# Altium PCB smartport_inverter_Panel5X5.PcbDoc
Units mm, origin at the board's own origin, x right, y up, seen from the top; angles counter-clockwise.
Board outline 81.92 x 79.98 mm, 2 copper layers (Top Layer, Bottom Layer), stack 1.57 mm thick; 8 components, 6 nets, 8 pads, 3 vias.
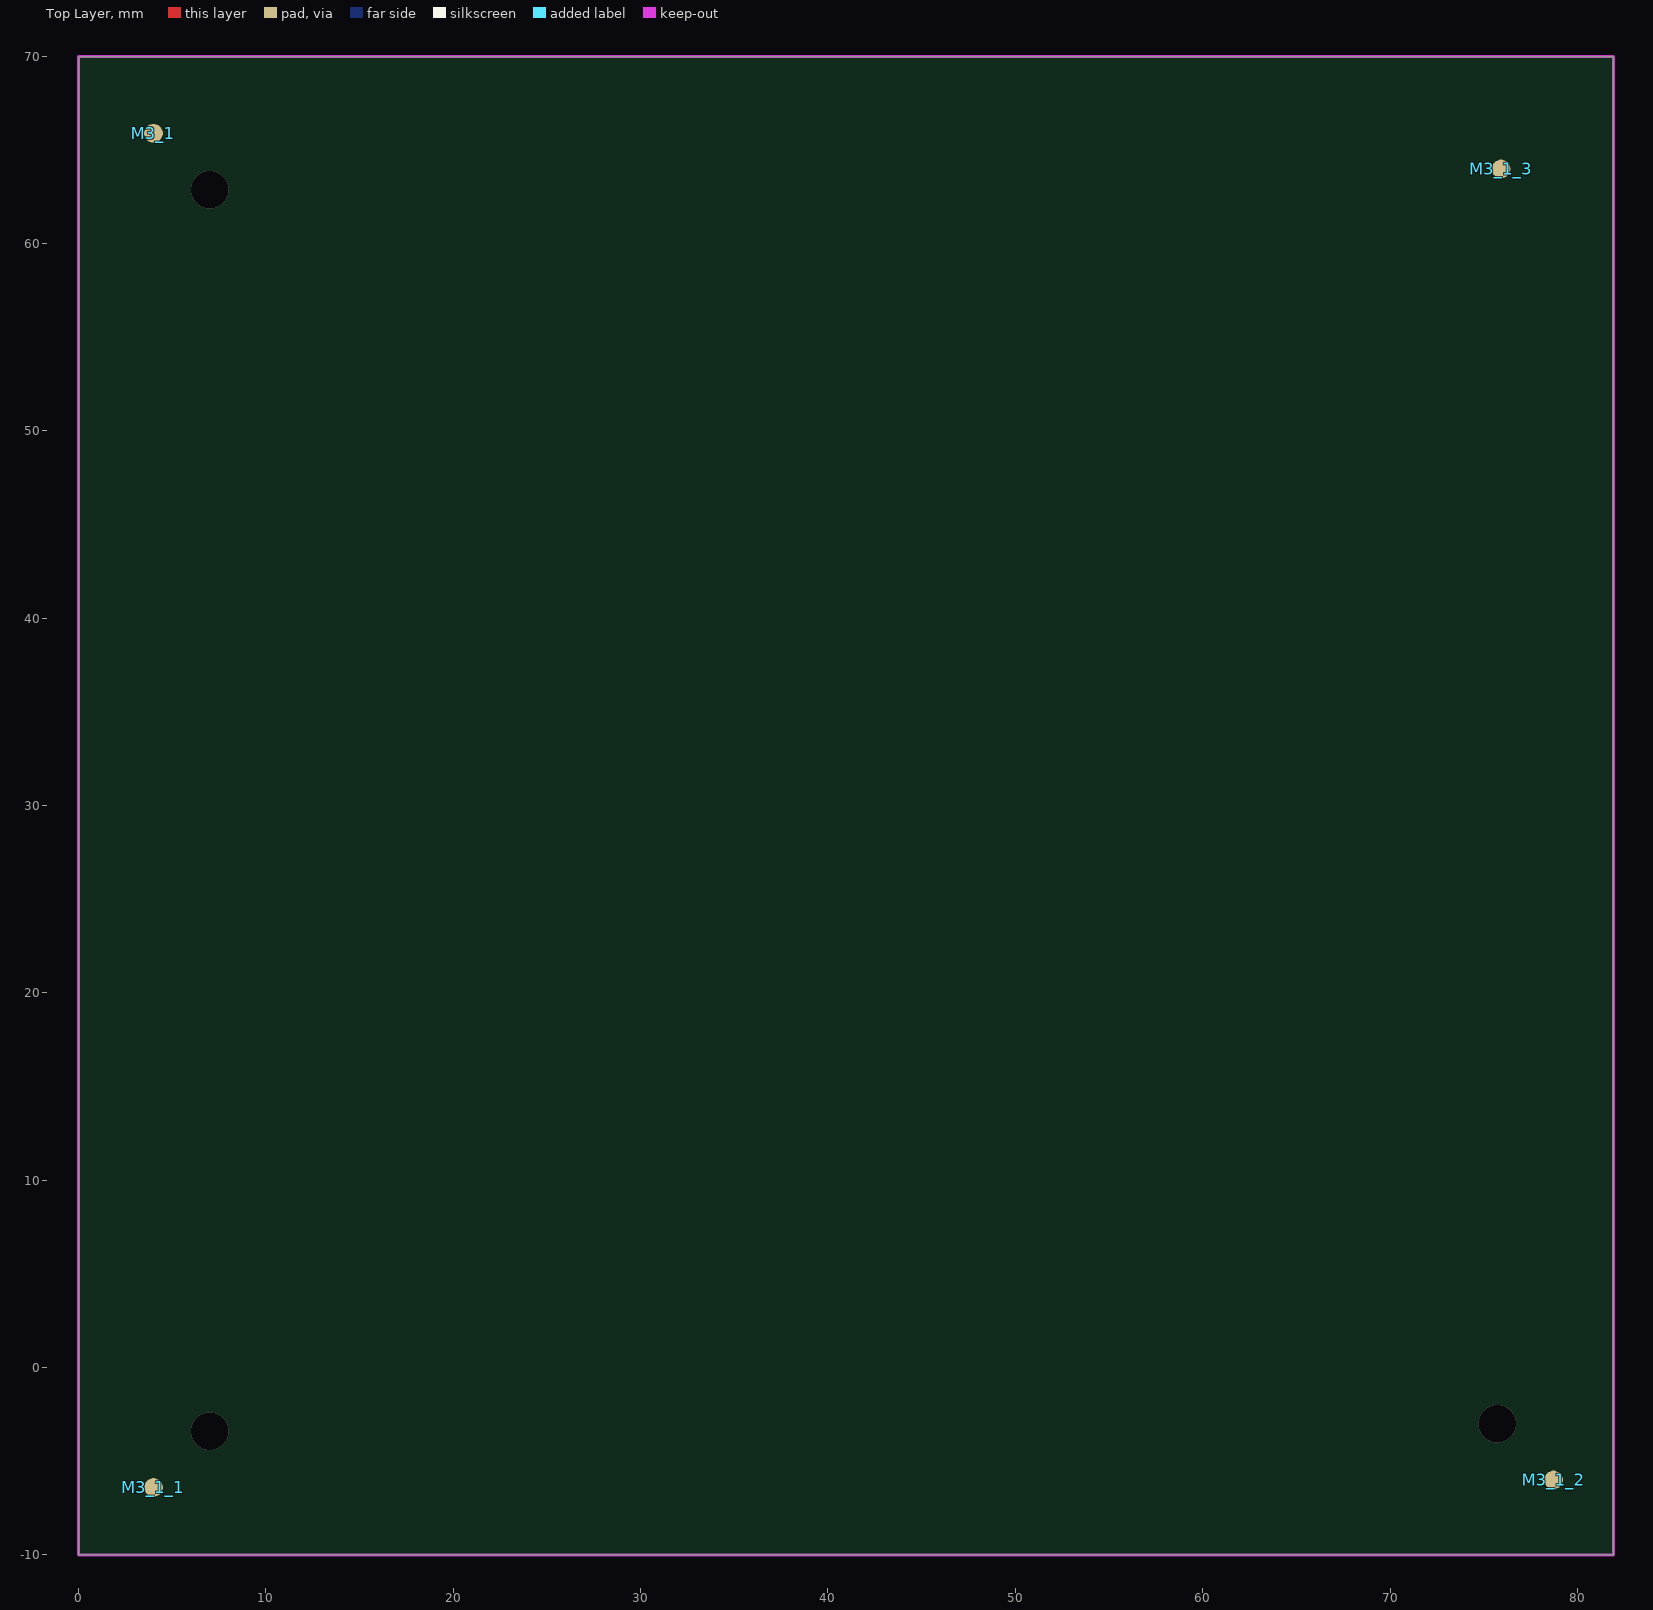
[diagram p0: Top Layer view]
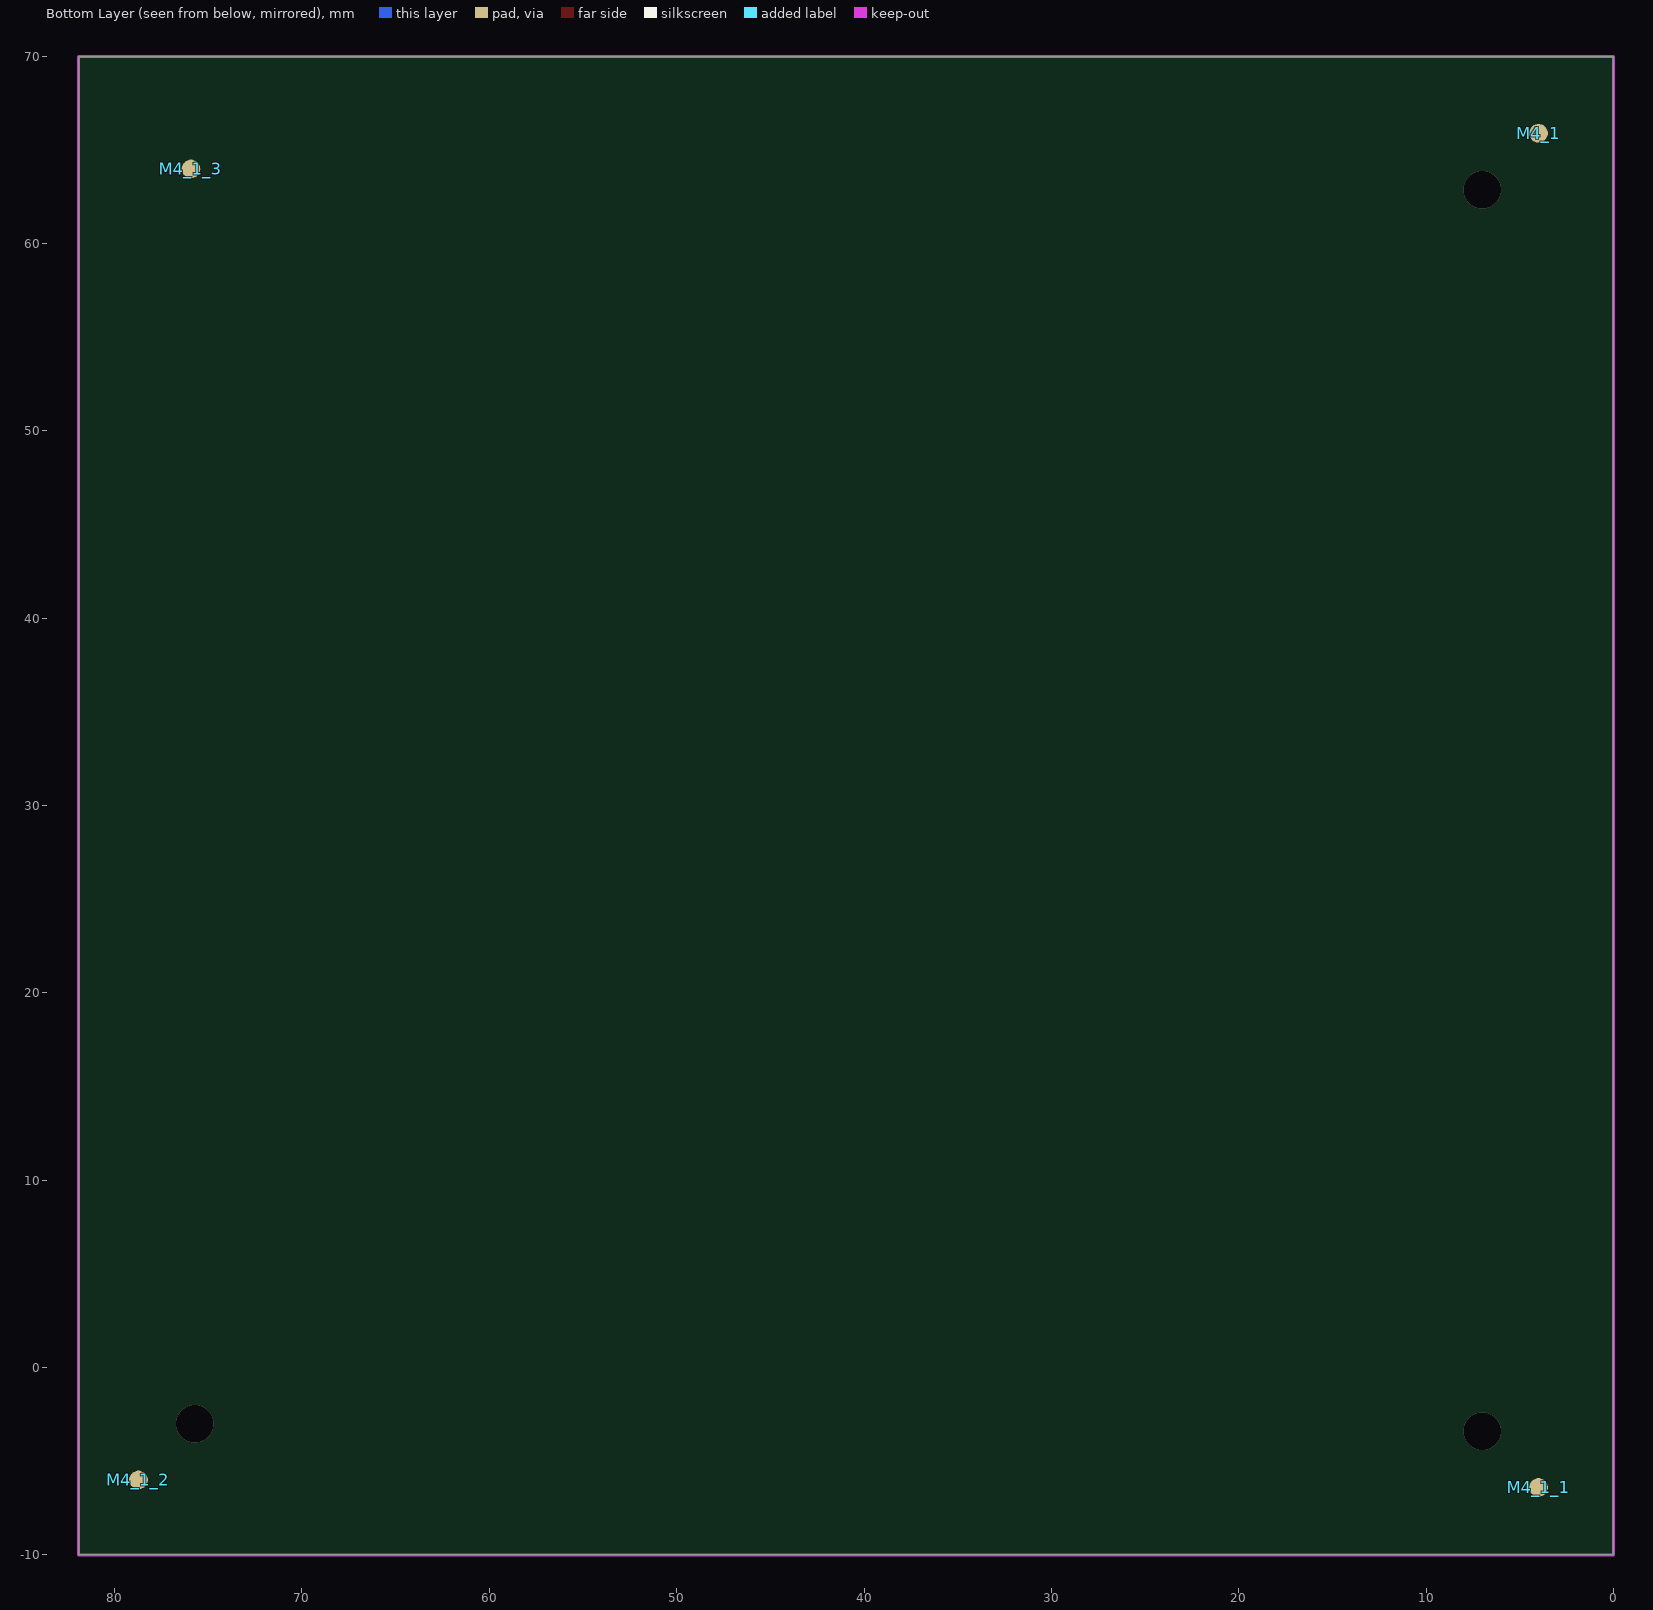
[diagram p1: Bottom Layer view, seen from below]

## Layer stack, top to bottom
Top Solder: solder mask 0.0102, Solder Resist, Dk 3.5
Top Layer: signal copper 0.035
Dielectric: core 1.5, FR-4, Dk 4.8
Bottom Layer: signal copper 0.035
Bottom Solder: solder mask 0.0102, Solder Resist, Dk 3.5

## Board outline
0,-10 81.925,-10 81.925,69.975 0,69.975

## Design rules (kind name [scope] priority, off if disabled: settings)
Clearance [All] p1: gap=0.35 ignorepadtopadclearanceinfootprint=FALSE except(0: Arc-Hole Track-THPad Track-Hole SMDPad-Hole THPad-Hole Via-Hole Fill-Hole Poly-Hole Region-Hole Text-Hole; 0.2: Arc-Arc Arc-Track Arc-SMDPad Arc-THPad Arc-Via Track-Track Track-SMDPad Track-Via SMDPad-SMDPad SMDPad-THPad SMDPad-Via THPad-THPad THPad-Via Via-Via)
ComponentClearance [All] p1: gap=0.25 collisioncheckmode=3 verticalgap=0 showdistances=FALSE
DiffPairsRouting DiffPairsRouting_USB [InDifferentialPair('USB')] p1: maxlimit=10 minlimit=0.1 mostfreqgap=0.1 toplayer_minwidth=0.16 toplayer_maxwidth=0.5 toplayer_prefwidth=0.2 bottomlayer_minwidth=0.16 bottomlayer_maxwidth=0.5 bottomlayer_prefwidth=0.2 maxuncoupledlength=12.7
DiffPairsRouting DiffPairsRouting_USB_D [InDifferentialPair('USB_D')] p2: maxlimit=10 minlimit=0.1 mostfreqgap=0.1 toplayer_minwidth=0.16 toplayer_maxwidth=0.5 toplayer_prefwidth=0.2 bottomlayer_minwidth=0.16 bottomlayer_maxwidth=0.5 bottomlayer_prefwidth=0.2 maxuncoupledlength=12.7
DiffPairsRouting DiffPairsRouting_ETH_RD [InDifferentialPair('ETH_RD')] p3: maxlimit=10 minlimit=0.1 mostfreqgap=0.1 toplayer_minwidth=0.16 toplayer_maxwidth=0.5 toplayer_prefwidth=0.2 bottomlayer_minwidth=0.16 bottomlayer_maxwidth=0.5 bottomlayer_prefwidth=0.2 maxuncoupledlength=12.7
DiffPairsRouting DiffPairsRouting_ETH_TD [InDifferentialPair('ETH_TD')] p4: maxlimit=10 minlimit=0.1 mostfreqgap=0.1 toplayer_minwidth=0.16 toplayer_maxwidth=0.5 toplayer_prefwidth=0.2 bottomlayer_minwidth=0.16 bottomlayer_maxwidth=0.5 bottomlayer_prefwidth=0.2 maxuncoupledlength=12.7
DiffPairsRouting [All] p5: maxlimit=0.16 minlimit=0.1 mostfreqgap=0.1 toplayer_minwidth=0.16 toplayer_maxwidth=0.5 toplayer_prefwidth=0.2 bottomlayer_minwidth=0.16 bottomlayer_maxwidth=0.5 bottomlayer_prefwidth=0.2 maxuncoupledlength=12.7
Height [All] p1: minheight=0 maxheight=20 prefheight=10
HoleSize HoleSize_BGA [isVia And WithinRoom('MCU_IO')] p1: absolutevalues=TRUE maxlimit=2.5 minlimit=0.1 maxpercent=80.000 minpercent=20.000
HoleSize [All] p2: absolutevalues=TRUE maxlimit=15 minlimit=0.2 maxpercent=80.000 minpercent=20.000
HoleToHoleClearance [All] p1: gap=0.4 allowstackedmicrovias=TRUE
MatchedLengths MD_MatchedLengths [InNetClass('MD')] p1: tolerance=2 checknetsindiffpair=FALSE checkdiffpairvsdiffpair=TRUE checkxsignals=TRUE checkothers=TRUE
MatchedLengths SD_MatchedLengths [InNetClass('SD')] p2: tolerance=8 checknetsindiffpair=FALSE checkdiffpairvsdiffpair=TRUE checkxsignals=TRUE checkothers=TRUE
MatchedLengths SSD_MatchedLengths [InNetClass('SSD')] p3: tolerance=10 checknetsindiffpair=FALSE checkdiffpairvsdiffpair=TRUE checkxsignals=TRUE checkothers=TRUE
MatchedLengths XIP_MatchedLengths [InNetClass('XIP')] p4: tolerance=10 checknetsindiffpair=FALSE checkdiffpairvsdiffpair=TRUE checkxsignals=TRUE checkothers=TRUE
MatchedLengths Flash [InNetClass('Flash')] p5: tolerance=1.27 checknetsindiffpair=FALSE checkdiffpairvsdiffpair=TRUE checkxsignals=TRUE checkothers=TRUE
MatchedLengths DiffPair_ETHMatchedLengths [InDifferentialPairClass('DP_ETH')] p6: tolerance=2.3 checknetsindiffpair=TRUE checkdiffpairvsdiffpair=FALSE checkxsignals=FALSE checkothers=FALSE
MatchedLengths RMII_MatchedLengths [InNetClass('RMII')] p7: tolerance=8 checknetsindiffpair=FALSE checkdiffpairvsdiffpair=TRUE checkxsignals=TRUE checkothers=TRUE
MatchedLengths DiffPair_DP_USBMatchedLengths [InDifferentialPair ('USB_D')] p8: tolerance=14.2 checknetsindiffpair=TRUE checkdiffpairvsdiffpair=FALSE checkxsignals=FALSE checkothers=FALSE
MinimumAnnularRing "MinimumAnnularRing Mid-Layer 1" [OnLayer('Mid-Layer 1')] p1: minimumring=0.35
MinimumAnnularRing "MinimumAnnularRing Mid-Layer 2" [OnLayer('Mid-Layer 2')] p2: minimumring=0.35
MinimumAnnularRing [All] p3: minimumring=0.1
MinimumSolderMaskSliver [All] p1: minsoldermaskwidth=0.07
NetAntennae NetAntennae_JTAG [InNetClass('JTAG')] p1: netantennaetolerance=20
NetAntennae [All] p2: netantennaetolerance=0
PlaneClearance [All] p1: clearance=0.5
PlaneConnect [All] p1: planeconnectstyle=Relief reliefexpansion=0.5 reliefentries=4 reliefconductorwidth=0.25 reliefairgap=0.25
PolygonConnect "PolygonConnect VDD1V8_L01_P044" [isPad vs (IsNamedPolygon('VDD1V8_L01_P048'))] p1: connectstyle=Relief reliefconductorwidth=0.254 reliefentries=4 polygonreliefangle="45 Angle" airgapwidth=0.254
PolygonConnect "PolygonConnect VDD1V8_L01_P034" [isPad vs (IsNamedPolygon('VDD1V8_L01_P036'))] p2: connectstyle=Relief reliefconductorwidth=0.254 reliefentries=4 polygonreliefangle="45 Angle" airgapwidth=0.254
PolygonConnect "PolygonConnect VDDR1V8_L01_P008" [isPad vs (IsNamedPolygon('VDDR1V8_L01_P008'))] p3: connectstyle=Relief reliefconductorwidth=0.254 reliefentries=4 polygonreliefangle="45 Angle" airgapwidth=0.254
PolygonConnect "PolygonConnect VDD1V8_L01_P046" [isPad vs (IsNamedPolygon('VDD1V8_L01_P048'))] p4: connectstyle=Relief reliefconductorwidth=0.254 reliefentries=4 polygonreliefangle="45 Angle" airgapwidth=0.254
PolygonConnect "PolygonConnect VDD1V8_L04_P038" [isPad vs (IsNamedPolygon('VDD1V8_L04_P044'))] p5: connectstyle=Relief reliefconductorwidth=0.254 reliefentries=4 polygonreliefangle="45 Angle" airgapwidth=0.254
PolygonConnect "PolygonConnect 1V8_L04_P036" [isPad vs (IsNamedPolygon('1V8_L04_P038'))] p6: connectstyle=Relief reliefconductorwidth=0.254 reliefentries=4 polygonreliefangle="45 Angle" airgapwidth=0.254
PolygonConnect "PolygonConnect 3V3_L01_P050" [isPad vs (IsNamedPolygon('3V3_L01_P050'))] p7: connectstyle=Relief reliefconductorwidth=0.254 reliefentries=4 polygonreliefangle="45 Angle" airgapwidth=0.254
PolygonConnect "PolygonConnect 1V8_L01_P048" [isPad vs (IsNamedPolygon('1V8_L01_P052'))] p8: connectstyle=Relief reliefconductorwidth=0.254 reliefentries=4 polygonreliefangle="45 Angle" airgapwidth=0.254
PolygonConnect "PolygonConnect 3V3_L04_P052" [isPad vs (IsNamedPolygon('3V3_L04_P054'))] p9: connectstyle=Relief reliefconductorwidth=0.254 reliefentries=4 polygonreliefangle="45 Angle" airgapwidth=0.254
PolygonConnect "PolygonConnect Mid-Layer 2-GND" [InComponentClass('All Components') and not HasFootprint('PQFN127P600X800X100_HS-9N') and not HasFootprint('QFN50P400X400X100-25N-D') and not HasFootprint('HOLE_3.2MM_PLATED') vs (IsNamedPolygon('GND_L03_P034'))] p10: connectstyle=Relief reliefconductorwidth=0.35 reliefentries=4 polygonreliefangle="90 Angle" airgapwidth=0.35
PolygonConnect [All] p11: connectstyle=Direct reliefconductorwidth=0.4 reliefentries=4 polygonreliefangle="90 Angle" airgapwidth=0.254
RoutingCorners [All] p1: cornerstyle=45-Degree minsetback=2 maxsetback=2
RoutingVias [All] p1: holewidth=0.3 width=0.8 viastyle="Through Hole" minholewidth=0.25 minwidth=0.48 maxholewidth=0.3 maxwidth=0.8
SilkToSilkClearance [All] p1: silktosilkclearance=0.25
SilkToSolderMaskClearance SilkscreenOverComponentPads [IsPad] p1: minsilkscreentomaskgap=0.25 clearancetoexposedcopper=TRUE
SolderMaskExpansion ISVIA [IsVia] p1: expansion=0.15 istentingtop=FALSE
SolderMaskExpansion [All] p2: expansion=0.065 istentingtop=FALSE
Width Width_BGA [WithinRoom('BGA')] p1: maxlimit=1 minlimit=0.1 preferedwidth=0.15 minimp=50.000000 maximp=50.000000 favimp=50.000000
Width [All] p2: maxlimit=5 minlimit=0.1 preferedwidth=0.15 minimp=50.000000 maximp=50.000000 favimp=50.000000
18 further rules are at their usual default settings.

## Classes and differential pairs
component class smartport_inverter: Q1 Q2 R1 R2 R3

## Components (designator, comment, footprint, x,y, rotation, side; value= is the part's Value field where it differs from the comment)
M3_1 "Marker" PASSER-KREIS 4,65.875 r270 top value=NP (schematic designator M3)
M3_1_1 "Marker" PASSER-KREIS 4,-6.4 r0 top value=NP (schematic designator M3)
M3_1_2 "Marker" PASSER-KREIS 78.725,-6 r90 top value=NP (schematic designator M3)
M3_1_3 "Marker" PASSER-KREIS 75.925,63.975 r270 top value=NP (schematic designator M3)
M4_1 "Marker" PASSER-KREIS 4,65.875 r90 bottom value=NP (schematic designator M3)
M4_1_1 "Marker" PASSER-KREIS 4,-6.4 r180 bottom value=NP (schematic designator M3)
M4_1_2 "Marker" PASSER-KREIS 78.725,-6 r270 bottom value=NP (schematic designator M3)
M4_1_3 "Marker" PASSER-KREIS 75.925,63.975 r90 bottom value=NP (schematic designator M3)

## Footprints (in the part's own frame and the unit in brackets; to place one, negate y for a bottom-side part, rotate by r counter-clockwise, add the part's x,y. Pads: shape width x height; smd on the part's side, far side on the other; paste and mask are expansions set on the pad)
PASSER-KREIS [mm]
  round 1 smd paste-0.5 mask+0.05: 1(0,0)
  Top Layer pour cut-out: -1.5,1.5 1.5,1.5 1.5,-1.5 -1.5,-1.5

## Part data
M3_1 M3_1_1 M3_1_2 M3_1_3 M4_1 M4_1_1 M4_1_2 M4_1_3: library part M

## Via types
v1: diameter 2, hole 2, Top Layer to Bottom Layer, 3 vias

## Nets (pads, with @x,y where several pads share a name; then routed paths per layer and width w, separated by ;. In a path a pad name is that pad's centre, name@x,y a point inside that pad or via, vN(x,y) a via of type N, cw(c..) or ccw(c..) an arc to the next point about the centre after c; other vN are vias at no path point)
5V: 
GND: 
NetQ2_3: 
RX: 
smartport: 
TX: 
pads on no net: M3_1.1 M3_1_1.1 M3_1_2.1 M3_1_3.1 M4_1.1 M4_1_1.1 M4_1_2.1 M4_1_3.1
copper on no net:
  other v1: 7,-3.4 75.725,-3 7,62.875

## Keep-outs
Keep-Out Layer:
  the board outline again, w0.152

## Silkscreen, mask and mechanical layers (free items; w line width, h text height)
Route Tool Path:
  lines w0.1: 0,0 81.925,0 ; 0,12 81.925,12 ; 0,24 81.925,24 ; 0,36 81.925,36 ; 0,48 81.925,48 ; 0,60 81.925,60
  lines w3: 15.5,0 15.5,60 ; 32.5,-0.025 32.5,59.975 ; 49.5,-0.025 49.5,59.975 ; 66.5,-0.025 66.5,59.975
  text "V-Core both sides full length of pcb" at -13.899,59.844 h0.9
  text "V-Core both sides full length of pcb" at -13.899,47.919 h0.9
  text "V-Core both sides full length of pcb" at -13.899,35.869 h0.9
  text "V-Core both sides full length of pcb" at -13.899,23.769 h0.9
  text "V-Core both sides full length of pcb" at -13.899,11.719 h0.9
  text "V-Core both sides full length of pcb" at -13.899,-0.206 h0.9
Mechanical 5:
  lines w0.1: 14,0 ccw(c15.5,0) 17,0 17,60 ccw(c15.5,60) 14,60 14,0 ; 31,-0.025 ccw(c32.5,-0.025) 34,-0.025 34,59.975 ccw(c32.5,59.975) 31,59.975 31,-0.025 ; 48,-0.025 ccw(c49.5,-0.025) 51,-0.025 51,59.975 ccw(c49.5,59.975) 48,59.975 48,-0.025 ; 65,-0.025 ccw(c66.5,-0.025) 68,-0.025 68,59.975 ccw(c66.5,59.975) 65,59.975 65,-0.025

## Panel: embedded boards
"smartport_inverter.PcbDoc" at 0,0, 5 rows x 5 columns, spacing 12 x 17, rotation 0